# Altium PCB 0-PCB2.PcbDoc
Units mil, origin at the board's own origin, x right, y up, seen from the top; angles counter-clockwise.
Board outline 1878.39 x 1878.39 mil, 2 copper layers (Top Layer, Bottom Layer); 29 components, 33 nets, 249 pads, 40 vias.
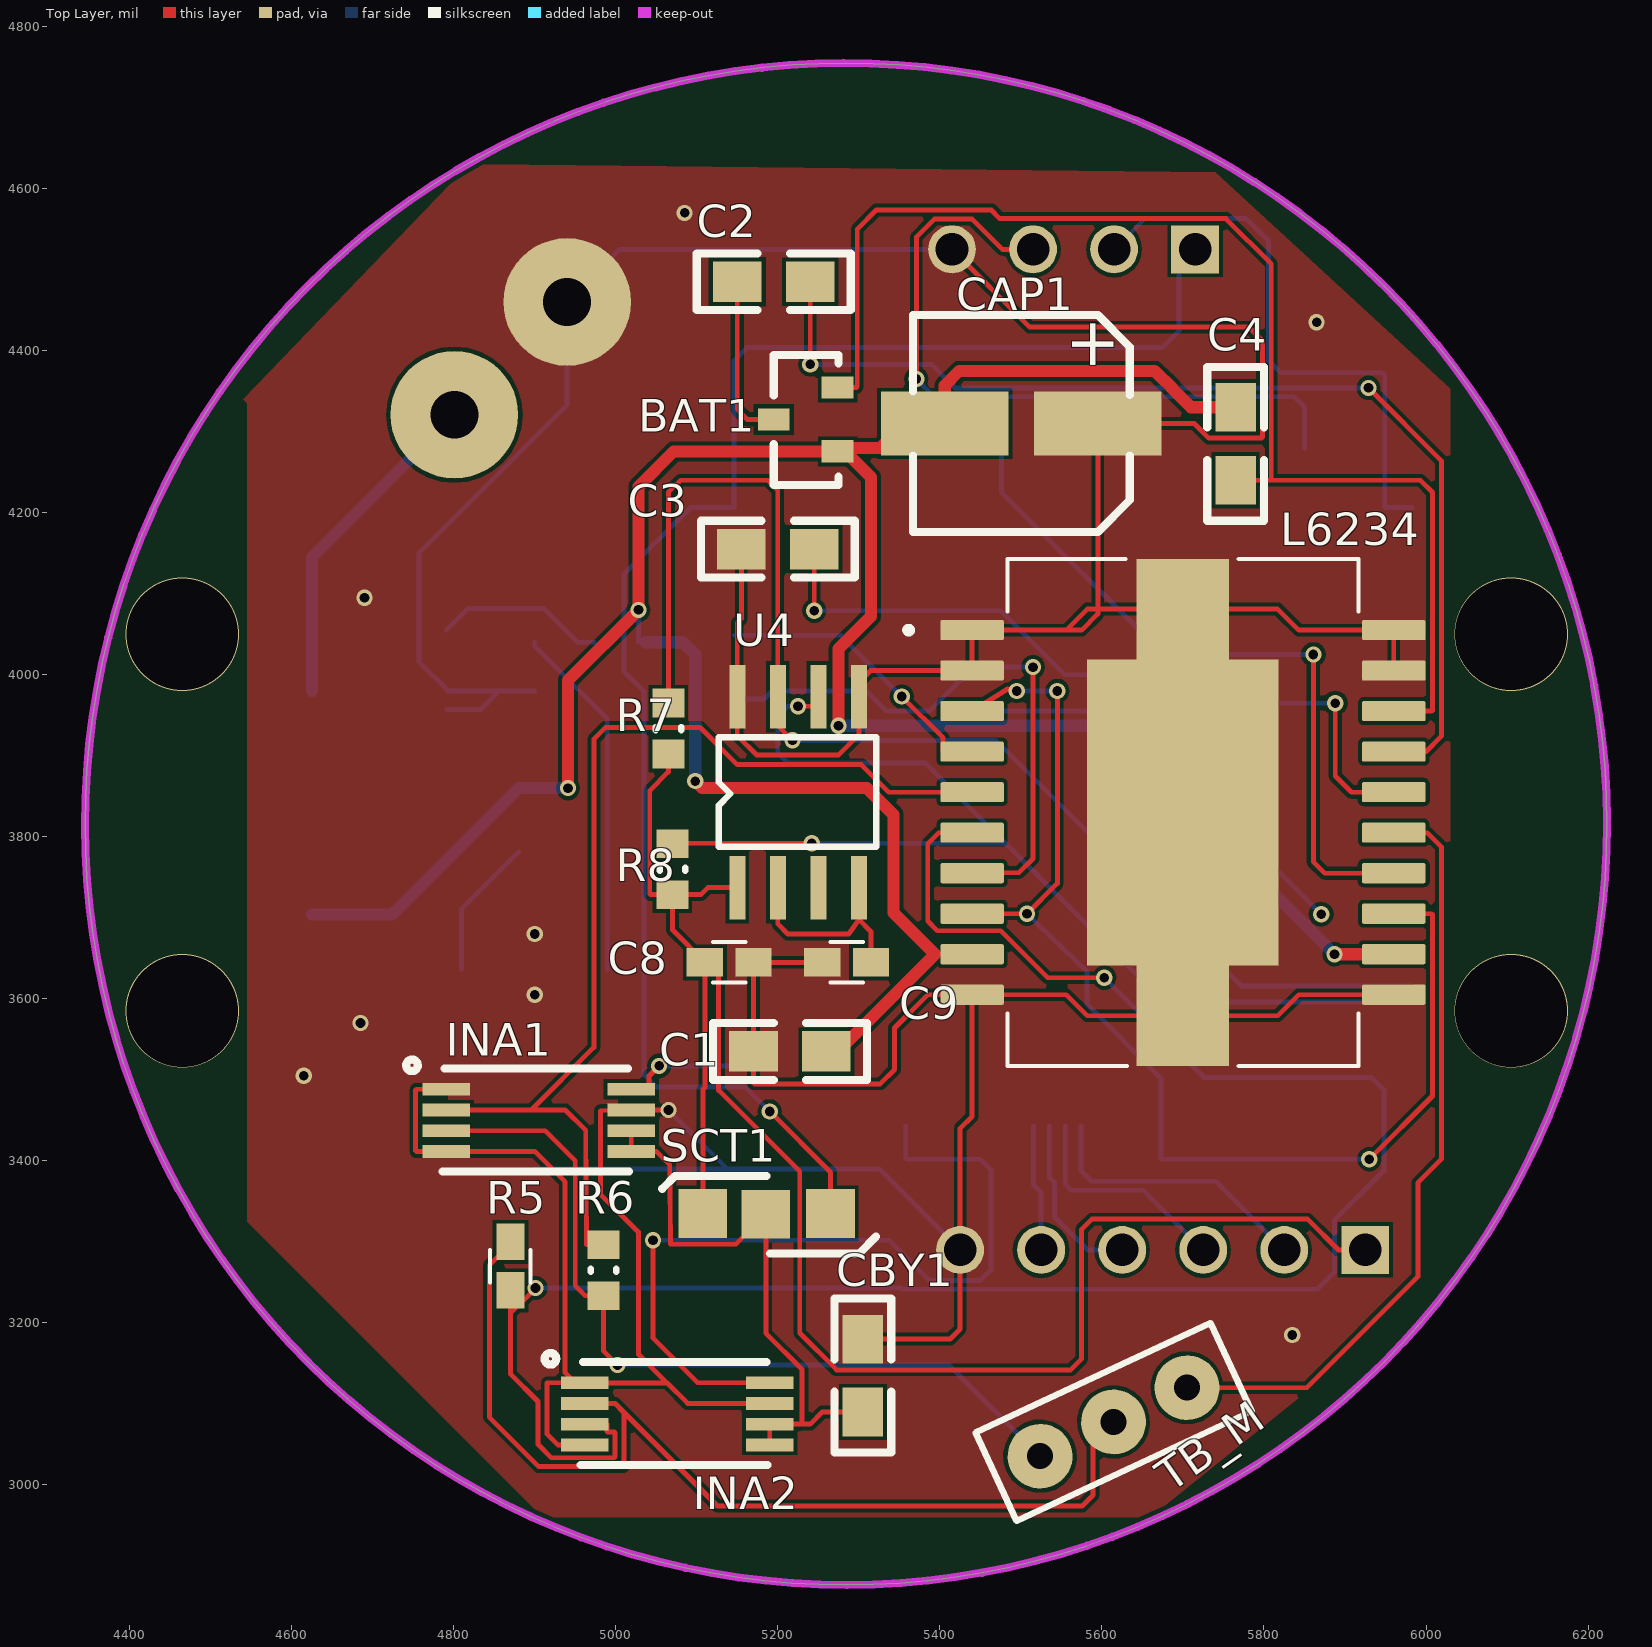
[diagram p0: Top Layer view]
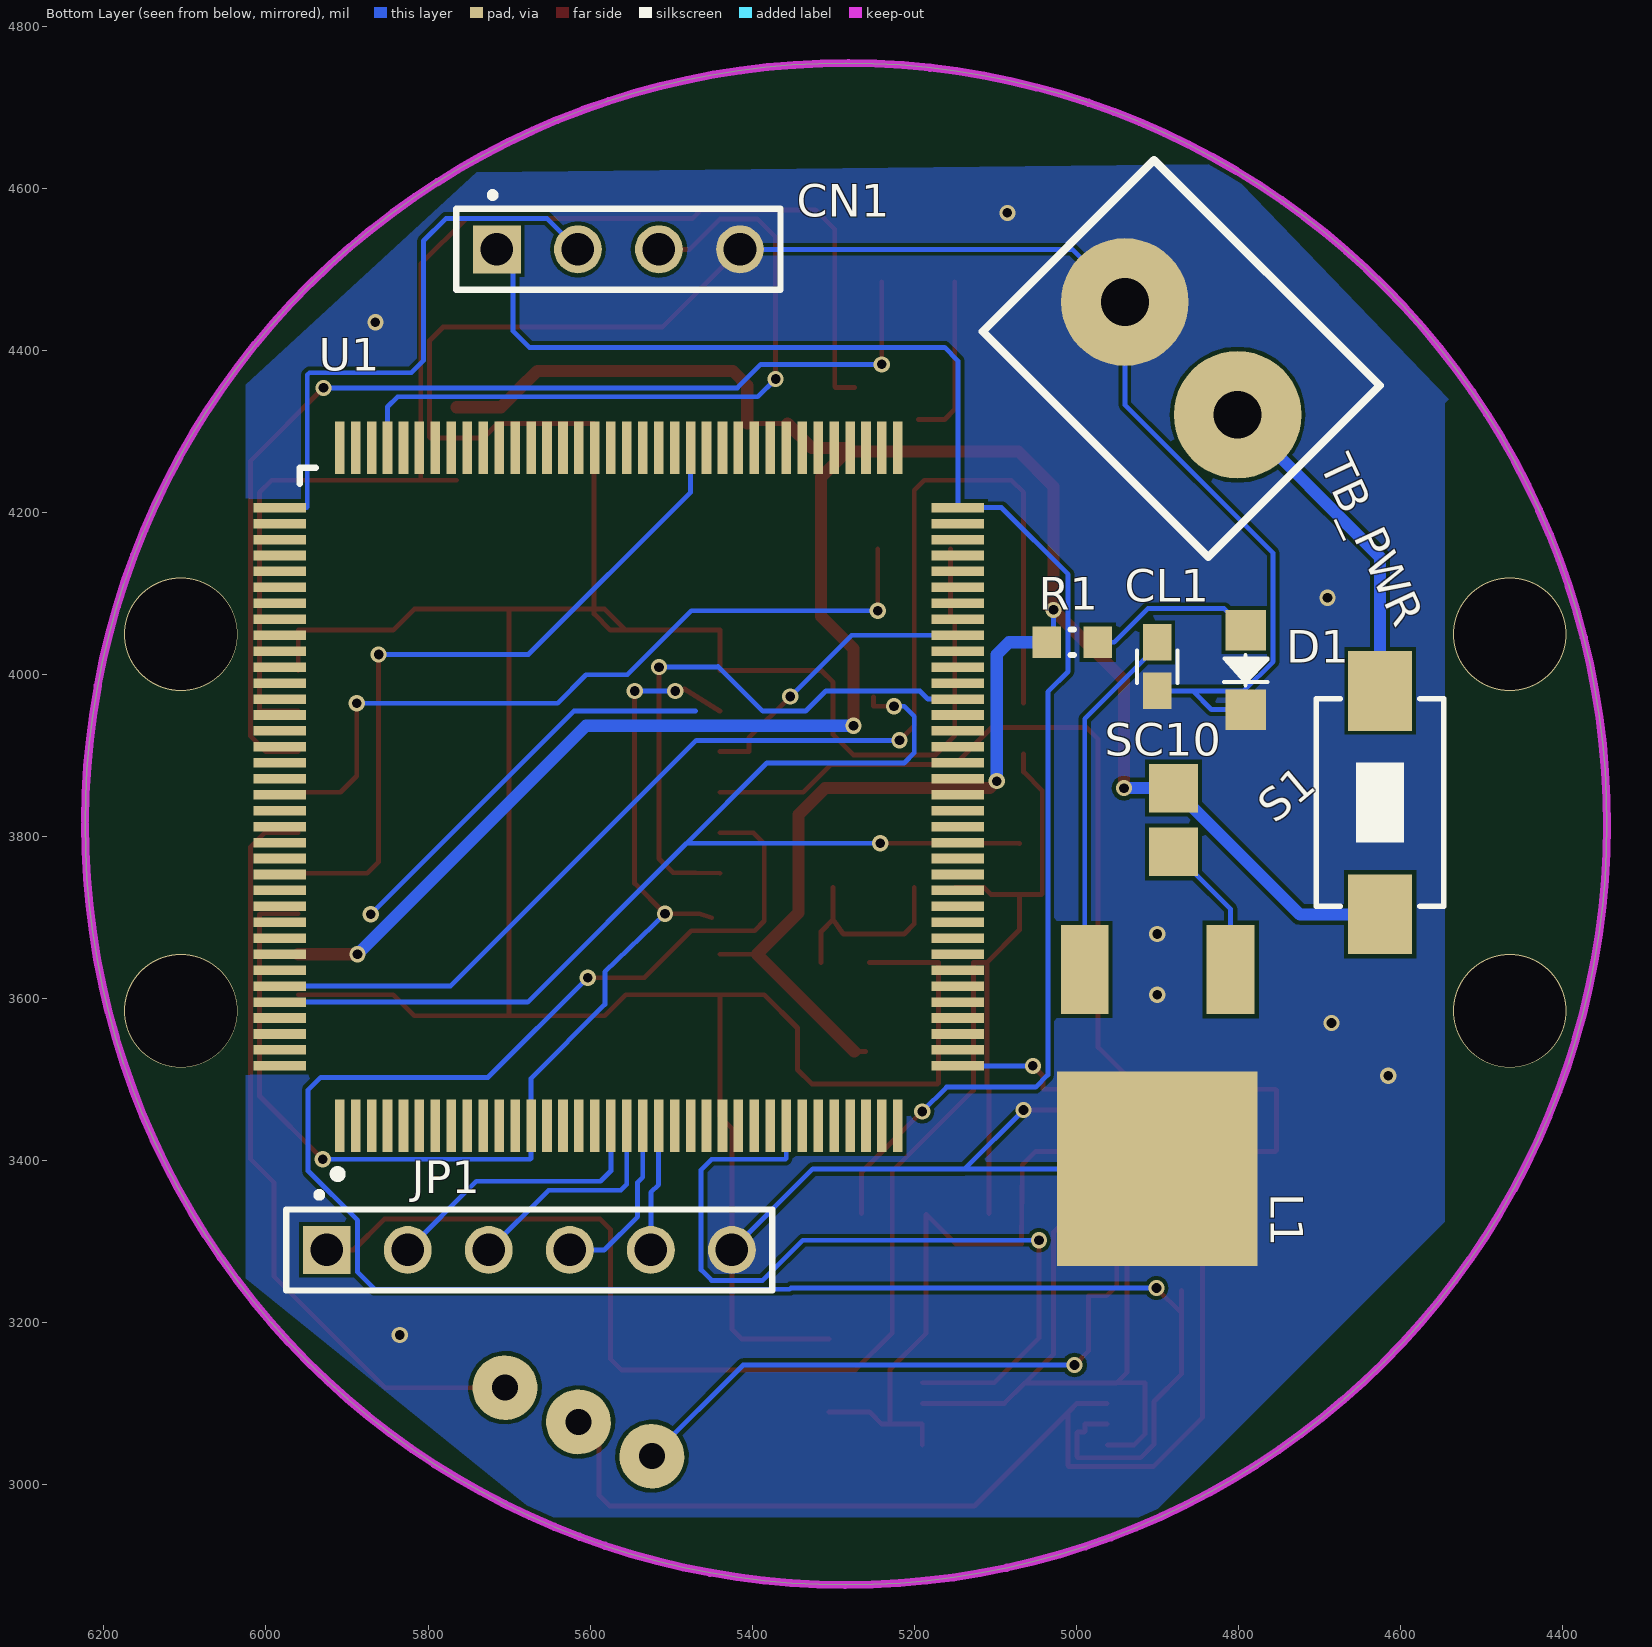
[diagram p1: Bottom Layer view, seen from below]

## Layer stack, top to bottom
Top Solder: solder mask 0.4, Solder Resist, Dk 3.5
Top Layer: signal copper 1.4
Dielectric 1: dielectric 12.6, FR-4, Dk 4.8
Bottom Layer: signal copper 1.4
Bottom Solder: solder mask 0.4, Solder Resist, Dk 3.5

## Board outline
4344.95,3815.73 ccw(c5284.15,3815.73) 5284.15,2876.54 ccw(c5284.15,3815.73) 6223.35,3815.73 ccw(c5284.15,3815.73) 5284.15,4754.93 ccw(c5284.15,3815.73)

## Design rules (kind name [scope] priority, off if disabled: settings)
Clearance [All] p1: gap=5 ignorepadtopadclearanceinfootprint=FALSE
HoleSize [All] p1: absolutevalues=TRUE maxlimit=150 minlimit=1 maxpercent=80.000 minpercent=20.000
HoleToHoleClearance [All] p1: gap=5 allowstackedmicrovias=TRUE
MinimumSolderMaskSliver [All] p1: minsoldermaskwidth=0
PlaneConnect [All] p1: planeconnectstyle=Direct reliefexpansion=20 reliefentries=4 reliefconductorwidth=10 reliefairgap=10
PolygonConnect [All] p1: connectstyle=Direct reliefconductorwidth=10 reliefentries=4 polygonreliefangle="90 Angle" airgapwidth=10
RoutingVias [All] p1: holewidth=12 width=24 viastyle="Through Hole" minholewidth=12 minwidth=24 maxholewidth=12 maxwidth=24
SilkToSilkClearance [All] p1: silktosilkclearance=5
SilkToSolderMaskClearance [IsPad] p1: minsilkscreentomaskgap=0 clearancetoexposedcopper=TRUE
SolderMaskExpansion [All] p1: expansion=3 useseparateexpansions=TRUE expansionbottom=3
Width [All] p1: maxlimit=20 minlimit=6 preferedwidth=6 minimp=50.000000 maximp=50.000000 favimp=50.000000
24 further rules are at their usual default settings.

## Components (designator, comment, footprint, x,y, rotation, side; value= is the part's Value field where it differs from the comment)
BAT1 "BAT54S" BAT54s 5195,4354.37 r0 top
C1 "100nF" C0805 5260,3535 r180 top
C2 "10nF" C0805 5150,4485 r0 top
C3 "1μF" C0805 5245,4155 r180 top
C4 "220nF" C0805 5765,4330 r270 top
C8 "100nF" R/C-0603 5110,3645 r0 top
C9 "1μF" R/C-0603 5315,3645 r180 top
CAP1 "EEH-ZA1E101XP" EEH-ZA1E101XP 5366.65,4176.14 r0 top
CBY1 "0.1μF" C0805 5305,3090 r90 top
CL1 "0.1μF" R/C-0603 4900,4040 r270 bottom
CN1 "SWD" HDR_1x4_2R54_V_M 5715,4525 r180 bottom
D1 "LED" D0805+ 4790.83,4055 r270 bottom
INA1 "INA240A1" INA240 4905,3450 r270 top
INA2 "INA240A2" INA240 5075.83,3087.8 r270 top
JP1 "SPI1" HDR_1x6_2R54_V_M 5925,3290 r180 bottom
L1 "l78M08" L7805 4900,3374.25 r270 bottom
L6234 "L6234PD013TR" SOIC127P1420X360-21N 5700,3830 r0 top
R1 "2K" 0603R 5005,4040 r180 bottom
R5 "10mOhm" R/C-0603 4870,3240 r90 top
R6 "10mOhm" 0603R 4985,3265 r270 top value=1K
R7 "4.7KOhm" 0603R 5065,3933.5 r270 top
R8 "4.7kOhm" 0603R 5070,3760 r270 top
S1 "SW SPST" SW_PB2_A1 4625,3840 r180 bottom
SC10 "solder_connection" solder_connection 4880,3860 r270 bottom
SCT1 "solder_connection_tripple" solder_connection_tripple 5186.26,3335 r180 top
TB_M "TB002-500-03BE" 10.7MHZ 5705,3120 r205 top
TB_PWR "TB002-500-02BE" TB002-500-02BE 4940,4460 r225 bottom
U1 "MCU_LQFP144" LQFP144_0R5_SKT 5564.57,3861.69 r180 bottom
U4 "AS5600" "SOIC 8" 5225,3855 r90 top

## Footprints (in the part's own frame and the unit in brackets; to place one, negate y for a bottom-side part, rotate by r counter-clockwise, add the part's x,y. Pads: shape width x height; smd on the part's side, far side on the other; paste and mask are expansions set on the pad)
10.7MHZ [mil]
  round 80 hole 32: 1(0,0) 2(200,0) 3(100,0)
  silkscreen extent -60,-60 260,60
0603R [mm] "Chip Resistor, Body 1.6x0.8mm, IPC Medium Density"
  rect 0.9x1 smd: 1(-0.8,0) 2(0.8,0)
  silkscreen extent -0.05,-0.4 0.05,0.4, body extent -0.85,-0.47 0.85,0.47, height 0.6
BAT54s [mm]
  rect 1x0.7 smd: 1(2,-2) 2(2,0) 3(0,-1)
  silkscreen extent 0,-3.05 2.03,1.02, body extent -0.46,-2.48 2.46,0.44, height 1
C0805 [mil]
  rect 60x50 smd: 1(0,0) 2(90,0)
  silkscreen extent -50,-35 140,35
D0805+ [mil]
  rect 50x50 smd: A(0,0) K(98,0)
  silkscreen extent 31,-27 68,27
EEH-ZA1E101XP [mm]
  rect 4x2 smd: 1(1,3.4) 2(5.8,3.4)
  silkscreen extent 0,0 6.8,6.8, body extent -0.3,0.2 7,6.8, height 7.7
HDR_1x4_2R54_V_M [mm] "Male Header, Pitch 2.54mm, 4x1 Position, Mated Height 6mm, Tail Length 3mm"
  rect 1.5x1.5 hole 1.02: 1(0,0)
  round 1.5 hole 1.02: 2(2.54,0) 3(5.08,0) 4(7.62,0)
  silkscreen extent -1.27,-1.27 8.89,1.76, body extent -1.27,-1.27 8.89,1.27, height 9
HDR_1x6_2R54_V_M [mm] "Male Header, Pitch 2.54mm, 6x1 Position, Mated Height 6mm, Tail Length 3mm"
  rect 1.5x1.5 hole 1.02: 1(0,0)
  round 1.5 hole 1.02: 2(2.54,0) 3(5.08,0) 4(7.62,0) 5(10.16,0) 6(12.7,0)
  silkscreen extent -1.27,-1.27 13.97,1.79, body extent -1.27,-1.27 13.97,1.27, height 9
INA240 [mm]
  rect 0.4x1.5 smd mask+0.05: 1(-0.975,-2.9) 2(-0.325,-2.9) 3(0.325,-2.9) 4(0.975,-2.9) 5(0.975,2.9) 6(0.325,2.9) 7(-0.325,2.9) 8(-0.975,2.9)
  silkscreen extent -1.91,-4.16 1.6,2.82, body extent -1.5,-3.3 1.5,3.3, height 1.2
L7805 [mm] "l7805"
  rect 2.8x1.5 smd: 1(-6.65,2.3) 3(-6.65,-2.272)
  rect 6.1x6.3 smd: 2(-0.4,0)
  body extent -7.66,-3.3 2.06,3.1, height 2.3
LQFP144_0R5_SKT [mm] "32-bit MCU ARM-based Cortex-M3 20 X 20mm, 0.5mm Pitch, 1.6mm Max thickness"
  rect 0.3x1.65 smd: 1(-8.75,-10.625) 2(-8.25,-10.625) 3(-7.75,-10.625) 4(-7.25,-10.625) 5(-6.75,-10.625) 6(-6.25,-10.625) 7(-5.75,-10.625) 8(-5.25,-10.625) 9(-4.75,-10.625) 10(-4.25,-10.625) 11(-3.75,-10.625) 12(-3.25,-10.625) 13(-2.75,-10.625) 14(-2.25,-10.625) 15(-1.75,-10.625) 16(-1.25,-10.625) 17(-0.75,-10.625) 18(-0.25,-10.625) 19(0.25,-10.625) 20(0.75,-10.625) 21(1.25,-10.625) 22(1.75,-10.625) 23(2.25,-10.625) 24(2.75,-10.625) 25(3.25,-10.625) 26(3.75,-10.625) 27(4.25,-10.625) 28(4.75,-10.625) 29(5.25,-10.625) 30(5.75,-10.625) 31(6.25,-10.625) 32(6.75,-10.625) 33(7.25,-10.625) 34(7.75,-10.625) 35(8.25,-10.625) 36(8.75,-10.625) 73(8.75,10.625) 74(8.25,10.625) 75(7.75,10.625) 76(7.25,10.625) 77(6.75,10.625) 78(6.25,10.625) 79(5.75,10.625) 80(5.25,10.625) 81(4.75,10.625) 82(4.25,10.625) 83(3.75,10.625) 84(3.25,10.625) 85(2.75,10.625) 86(2.25,10.625) 87(1.75,10.625) 88(1.25,10.625) 89(0.75,10.625) 90(0.25,10.625) 91(-0.25,10.625) 92(-0.75,10.625) 93(-1.25,10.625) 94(-1.75,10.625) 95(-2.25,10.625) 96(-2.75,10.625) 97(-3.25,10.625) 98(-3.75,10.625) 99(-4.25,10.625) 100(-4.75,10.625) 101(-5.25,10.625) 102(-5.75,10.625) 103(-6.25,10.625) 104(-6.75,10.625) 105(-7.25,10.625) 106(-7.75,10.625) 107(-8.25,10.625) 108(-8.75,10.625)
  rect 1.65x0.3 smd: 37(10.625,-8.75) 38(10.625,-8.25) 39(10.625,-7.75) 40(10.625,-7.25) 41(10.625,-6.75) 42(10.625,-6.25) 43(10.625,-5.75) 44(10.625,-5.25) 45(10.625,-4.75) 46(10.625,-4.25) 47(10.625,-3.75) 48(10.625,-3.25) 49(10.625,-2.75) 50(10.625,-2.25) 51(10.625,-1.75) 52(10.625,-1.25) 53(10.625,-0.75) 54(10.625,-0.25) 55(10.625,0.25) 56(10.625,0.75) 57(10.625,1.25) 58(10.625,1.75) 59(10.625,2.25) 60(10.625,2.75) 61(10.625,3.25) 62(10.625,3.75) 63(10.625,4.25) 64(10.625,4.75) 65(10.625,5.25) 66(10.625,5.75) 67(10.625,6.25) 68(10.625,6.75) 69(10.625,7.25) 70(10.625,7.75) 71(10.625,8.25) 72(10.625,8.75) 109(-10.625,8.75) 110(-10.625,8.25) 111(-10.625,7.75) 112(-10.625,7.25) 113(-10.625,6.75) 114(-10.625,6.25) 115(-10.625,5.75) 116(-10.625,5.25) 117(-10.625,4.75) 118(-10.625,4.25) 119(-10.625,3.75) 120(-10.625,3.25) 121(-10.625,2.75) 122(-10.625,2.25) 123(-10.625,1.75) 124(-10.625,1.25) 125(-10.625,0.75) 126(-10.625,0.25) 127(-10.625,-0.25) 128(-10.625,-0.75) 129(-10.625,-1.25) 130(-10.625,-1.75) 131(-10.625,-2.25) 132(-10.625,-2.75) 133(-10.625,-3.25) 134(-10.625,-3.75) 135(-10.625,-4.25) 136(-10.625,-4.75) 137(-10.625,-5.25) 138(-10.625,-5.75) 139(-10.625,-6.25) 140(-10.625,-6.75) 141(-10.625,-7.25) 142(-10.625,-7.75) 143(-10.625,-8.25) 144(-10.625,-8.75)
  silkscreen extent -10,-12.27 -8.69,10
R/C-0603 [mil]
  rect 45x35 smd: 1(0,0) 2(60,0)
  silkscreen extent 10,-25 50,25
SOIC127P1420X360-21N [mm]
  rrect16% 1.99x0.63 smd: 1(-6.61,5.715) 2(-6.61,4.445) 3(-6.61,3.175) 4(-6.61,1.905) 5(-6.61,0.635) 6(-6.61,-0.635) 7(-6.61,-1.905) 8(-6.61,-3.175) 9(-6.61,-4.445) 10(-6.61,-5.715) 11(6.61,-5.715) 12(6.61,-4.445) 13(6.61,-3.175) 14(6.61,-1.905) 15(6.61,-0.635) 16(6.61,0.635) 17(6.61,1.905) 18(6.61,3.175) 19(6.61,4.445) 20(6.61,5.715)
  rect 6x9.6 smd paste-6: 21(0,0)
  rect 2.9x3.15 smd paste-3: 22(0,6.375) 23(0,-6.375)
  silkscreen extent -8.7,-7.95 5.5,7.95
"SOIC 8" [mm]
  rect 2x0.5 smd: 1(-2.993,1.905) 2(-2.993,0.635) 3(-2.993,-0.635) 4(-2.993,-1.905) 5(2.993,-1.905) 6(2.993,-0.635) 7(2.993,0.635) 8(2.993,1.905)
  silkscreen extent -1.71,-2.45 1.72,2.48
solder_connection [mil]
  rect 60x60 smd: 1(0,0) 2(78.74,0)
solder_connection_tripple [mil]
  rect 60x60 smd: 1(0.98,0.98) 2(78.74,0) 3(-78.74,0)
  Top Layer region: -28.54,34.45
  silkscreen extent -135,-46 129,49
SW_PB2_A1 [mm]
  rect 2x2.5 smd: 1(0,3.556) 2(0,-3.444)
  silkscreen extent -2,-3.19 2,3.31, body extent -2.03,-3.18 2.03,3.3, height 1.2
TB002-500-02BE [mm] "TB002-500-02BE"
  round 4 hole 1.5: 1(0,0) 2(5,0)
  silkscreen extent -2.5,-3.8 7.5,3.8, body extent -2.5,-4.4 7.5,4.6, height 13.55

## Part data
BAT1: Supplier Part Number 1=512-BAT54S, Supplier 1=Mouser
C1 C2 C3 C4 CBY1: library part CAP_1
C8 C9 CL1: library part CAP, "Capacitor"
CAP1: Supplier Part Number 1=667-EEH-ZA1E101XP, Supplier 1=Mouser
CN1: library part "Header 4", "Header, 4-Pin, Single row", Publisher="Altium Limited", Revision="17-Jul-2002: Re-released for DXP Platform."
INA1 INA2: library part INA240, Supplier Part Number 1=595-INA240A2PWR, Supplier 1=Mouser
JP1: library part "HEADER 6"
L6234: "Motor Driver BiCDMOS Parallel PowerSO-20", Package="SO-20 STMicroelectronics", Digi-Key_Part_Number=497-5352-1-ND, Digi-Key_Purchase_URL=https://www.digikey.com/product-detail/en/stmicroelectronics/L6234PD013TR/497-5352-1-ND/1154483?utm_source=snapeda&utm_medium=aggregator&utm_campaign=symbol, MF=STMicroelectronics, MP=L6234PD013TR, SnapEDA_Link=https://www.snapeda.com/parts/L6234PD013TR/STMicroelectronics/view-part/75337/?ref=snap
R1: library part RES1
R5 R7 R8: library part RES2
R6: library part Res1, "Resistor", Ordered by=Subcon, Published=8-Jun-2000, Publisher="Altium Limited", Revision="July-2002: Re-released for DXP Platform."
TB_M: Supplier Part Number 1=490-TB002-500-03BE, Supplier 1=Mouser
TB_PWR: Supplier Part Number 1=490-TB002-500-02BE, Supplier 1=Mouser

## Via types
v1: diameter 20, hole 12, Top Layer to Bottom Layer, 36 vias
v2: diameter 140, hole 138, Top Layer to Bottom Layer, 4 vias

## Nets (pads, with @x,y where several pads share a name; then routed paths per layer and width w, separated by ;. In a path a pad name is that pad's centre, name@x,y a point inside that pad or via, vN(x,y) a via of type N, cw(c..) or ccw(c..) an arc to the next point about the centre after c; other vN are vias at no path point)
+3.3: CN1.1 SCT1.3 U1.72 | length 1995.8
  Top Layer w6: v1(5190,3461) 5265,3386 SCT1.3
  Bottom Layer w6: U1.72 U1.72@5146,4206.18 ; v1(5190,3461) 5160,3491 5050,3491 5035,3506 5035,3979 5010,4004 5010,4124 5092.18,4206.18 U1.72@5146,4206.18 ; CN1.1 5695,4525 5695,4424 5675,4404 5162.5,4404 5146,4387.5 U1.72@5146,4206.18
+5: C8.1 JP1.1 R7.2 R8.2 SCT1.2 U4.1 | length 2124.4
  Top Layer w6: R7.2 5065,3880 5042,3857 5042,3729.51 5043,3728.51 R8.2 ; SCT1.2 5107.52,3488 5110,3490.48 C8.1 ; U4.1 5113.66,3737.17 5105,3728.51 R8.2 ; JP1.1 5892,3290 5854,3328 5587.5,3328 5575,3315.5 5575,3155.5 5561.5,3142 5272.5,3142 5227,3187.5 5227,3387 5127,3487 5127,3645 C8.1 ; R8.2 5070,3685 C8.1
GND: C1.2 C3.2 C8.2 C9.2 CAP1.2 CBY1.2 CL1.2 CN1.4 D1.K INA1.1 INA1.4 INA1.7 INA2.1 INA2.4 INA2.7 JP1.6 L1.2 L6234.1 L6234.2 L6234.10 L6234.11 L6234.19 L6234.20 L6234.21 L6234.22 L6234.23 TB_PWR.1 U4.5 U4.8 | length 7922.5
  Top Layer w6: INA1.1 4754,3488.39 4753,3487.39 4753,3412.61 4754,3411.61 INA1.4 4900,3411.61 4937.5,3374.11 4937.5,3138.5 INA2.1@4949.82,3126.18 ; INA2.4 4928.36,3049.41 4915.27,3062.5 4915.27,3125.59 4915.86,3126.18 INA2.1@4949.82,3126.18 ; v1(5065,3462.8) INA1.7 4981,3461.8 4981,3359 5028,3312 5028,3161.18 5063,3126.18 ; C3.2 5155,4069 5150,4064 U4.8 5150,3924.73 5173.73,3901 5275,3901 5300,3926 U4.5 5300,3990.58 5314.42,4005 L6234.2 L6234.1 5556,4055 ; INA2.7 5088.59,3100.59 5063.18,3126 ; C9.2 C8.2 C1.2 5170,3496 5171,3495 5326.5,3495 5344,3512.5 5344,3564 5385,3605 L6234.10 ; CBY1.2 5412.5,3180 5425,3192.5 JP1.6 5425,3440 5439.76,3454.76 L6234.10 ; CN1.4 5511,4429 5781.5,4429 5798,4412.5 5798,4293 5797,4292 5732,4292 5714,4310 CAP1.2 5595,4080.98 ; L6234.11 5842.99,3605 5817,3579.01 L6234.23 ; L6234.19 L6234.20 5842.98,4055 5817,4080.98 L6234.22 ; INA2.1@4949.82,3126.18 4950,3126 5063.18,3126 ; INA2.1@4949.82,3126.18 INA2.1 5063,3126.18 ; 5063,3126.18 5063.18,3126 ; L6234.10 5556,3605 5581.99,3579.01 L6234.23 ; 5556,4055 5581.98,4080.98 5595,4080.98 ; 5556,4055 5575,4055 5595,4075 5595,4080.98 ; 5595,4080.98 L6234.22 ; L6234.23 L6234.21 L6234.22
  Bottom Layer w6: D1.K 4833,3957 4856,3980 ; L1.2 5137.8,3390 ; CL1.2 4856,3980 ; v1(5065,3462.8) 5137.8,3390 ; CN1.4 5005,4525 TB_PWR.1 4940,4333 4757,4150 4757,4016 4793,3980 4856,3980 ; JP1.6 5325,3390 5137.8,3390
  other v1: 5835,3185 4615,3505 4685,3570 4900,3605 4900,3680 4690,4095 5865,4435 5085,4570
NetBAT1_2: BAT1.2 C4.2 L6234.18 | length 1601.4
  Top Layer w6: BAT1.2 5297,4354.37 5298,4355.37 5298,4550 5321.53,4573.53 5463.53,4573.53 5474.06,4563 5753,4563 5809,4507 5809,4241 5808,4240 ; C4.2 5808,4240 ; L6234.18 6007,3955 6008,3956 6008,4225 5993,4240 5808,4240
NetBAT1_3: BAT1.3 C2.1 | length 207.7
  Top Layer w6: C2.1 5150,4327.5 5162.5,4315 BAT1.3
NetC2_2: C2.2 L6234.17 | length 1336.9
  Top Layer w6: v1(5240,4383) C2.2 ; v1(5929,4354) 6019,4264 6019,3924 6000,3905 L6234.17
  Bottom Layer w6: v1(5240,4383) 5389.15,4383 5418.15,4354 v1(5929,4354)
NetC3_1: C3.1 L6234.16 | length 936.6
  Top Layer w6: v1(5245,4079) C3.1 ; v1(5888,3964.84) 5888,3875 5908,3855 L6234.16
  Bottom Layer w6: v1(5245,4079) 5475,4079 5554,4000 5605,4000 5640.16,3964.84 v1(5888,3964.84)
NetC9_1: C9.1 U4.2 U4.4 | length 257.6
  Top Layer w6: U4.2 5200,3692.5 5212.5,3680 5287.5,3680 U4.4@5300,3698 ; U4.4 U4.4@5300,3698 ; C9.1 5315,3683 U4.4@5300,3698
NetCBY1_1: CBY1.1 INA1.5 INA1.6 INA2.5 INA2.6 SCT1.1 | length 735.6
  Top Layer w6: INA1.6 INA1.5 5050,3411.61 5066.69,3394.93 5067.69,3297 5148.26,3297 SCT1.1 5185.28,3187.22 5230,3142.5 5230,3076 5229,3075 ; INA2.5 INA2.6 5229,3075 ; CBY1.1 5255,3090 5240,3075 5229,3075
NetCL1_1: CL1.1 L1.3 | length 441
  Bottom Layer w6: CL1.1 4900,4035 4989.45,3945.55 L1.3
NetCN1_2: CN1.2 U1.109 | length 713.3
  Bottom Layer w6: CN1.2 5653,4563 5778,4563 5805.76,4535.24 5805.76,4387.5 5820.51,4372.74 5946.23,4372.74 5949,4369.97 5949,4207.18 5950,4206.18 U1.109
NetCN1_3: CN1.3 U1.105 | length 887.7
  Top Layer w6: v1(5371,4365) 5371,4540 5393.53,4562.53 5439.47,4562.53 5477,4525 CN1.3
  Bottom Layer w6: v1(5371,4365) 5393,4343 5837.5,4343 5850,4330.5 U1.105
NetD1_A: D1.A R1.2 | length 210.8
  Bottom Layer w6: D1.A 4817.33,4081.5 4911.5,4081.5 4953,4040 R1.2
NetINA1_2: INA1.2 L6234.5 R6.1 | length 1340.2
  Top Layer w6: INA1.2 4895.8,3462.8 ; R6.1 4964,3296.5 4963,3437.5 4937.7,3462.8 4895.8,3462.8 ; L6234.5 5337,3855 5303,3889 5150,3889 5104,3935 4987.5,3935 4973,3920.5 4973,3540 4895.8,3462.8
NetINA1_3: INA1.3 R6.2 TB_M.2 | length 1029.7
  Top Layer w6: INA1.3 4912.85,3437.2 4950,3400.06 4950,3246.01 4962.5,3233.51 R6.2 4985,3165 v1(5002,3148)
  Bottom Layer w6: v1(5002,3148) 5411.21,3148 TB_M.2
NetINA1_8: INA1.8 U1.37 | length 148.6
  Top Layer w6: INA1.8 5041,3488.39 5041,3504.71 v1(5053.5,3517.21)
  Bottom Layer w6: v1(5053.5,3517.21) U1.37
NetINA2_2: INA2.2 R5.2 TB_M.3 | length 1285.9
  Top Layer w6: R5.2 4870,3297 4844,3271 4844,3083.5 4904.97,3022.53 5009,3022.53 5010.18,3023.72 5010.18,3089.41 ; INA2.2 4999,3100.59 5010.18,3089.41 ; TB_M.3 5589,3077.73 5589,2987.5 5575.5,2974 5125.59,2974 5010.18,3089.41
NetINA2_3: INA2.3 L6234.6 R5.1 | length 2477.8
  Top Layer w6: R5.1 4870,3212 ; v1(4901,3243) 4870,3212 ; INA2.3 4989,3075 4989,3066.29 4990,3065.29 4998,3065.29 4999.18,3064.1 4999.18,3034.72 4998,3033.53 4920.47,3033.53 4904,3050 4904,3103 4870,3137 4870,3212 ; L6234.6 5398.5,3805 5385,3791.5 5385,3696 5397,3684 5475,3684 5533,3626 v1(5603,3626)
  Bottom Layer w6: v1(4901,3243) 5352.23,3243 5353.75,3241.47 5865.97,3241.47 5887,3262.5 5887,3326.5 5948,3387.5 5948,3487.5 5932.5,3503 5726,3503 v1(5603,3626)
NetINA2_8: INA2.8 U1.29 | length 1005.3
  Top Layer w6: v1(5046,3302) 5046,3181.18 5101,3126.18 INA2.8
  Bottom Layer w6: v1(5046,3302) 5337.47,3302 5387,3252.47 5450,3252.47 5463,3265.47 5463,3389 5450,3402 5358.87,3402 5357.87,3403 U1.29
NetJP1_2: JP1.2 U1.18 | length 346.9
  Bottom Layer w6: U1.18 5574.41,3387.5 5587.18,3374.73 5740.27,3374.73 JP1.2
NetJP1_3: JP1.3 U1.19 | length 276.2
  Bottom Layer w6: U1.19 5554.72,3371 5562,3363.73 5651.27,3363.73 JP1.3
NetJP1_4: JP1.4 U1.20 | length 215.5
  Bottom Layer w6: U1.20 5535.04,3379.96 5541.4,3373.6 5541.4,3331.19 5582.59,3290 JP1.4
NetJP1_5: JP1.5 U1.21 | length 157.4
  Bottom Layer w6: U1.21 5515.35,3370.65 5525,3361 JP1.5
NetL1_1: L1.1 SC10.2 | length 174.4
  Bottom Layer w6: L1.1 4809.45,3710.71 SC10.2
NetL6234_3: L6234.3 L6234.8 L6234.13 U1.13 | length 1473.8
  Top Layer w6: L6234.3 5483.99,3982.56 v1(5495,3980) ; L6234.8@5449.76,3700 5465,3705 v1(5507.5,3705) 5545,3742.5 v1(5545,3980) ; v1(5930,3402) 6008,3480 6008,3704 6007,3705 L6234.13
  Bottom Layer w6: v1(5495,3980) v1(5545,3980) ; v1(5507.5,3705) 5581.74,3633.26 5581.74,3593.08 5672.83,3501.99 U1.13 5672.83,3403 5673.83,3402 v1(5930,3402)
NetL6234_4: L6234.4 U1.64 | length 363
  Top Layer w6: v1(5353,3973) 5404,3922 5404,3905 L6234.4
  Bottom Layer w6: U1.64 5277.3,4048.7 v1(5353,3973)
NetL6234_7: L6234.7 U1.60 | length 724.9
  Top Layer w6: L6234.7 5498,3756 5515,3773 v1(5515,4009.33)
  Bottom Layer w6: U1.60 5183.01,3969.96 5192.97,3979.92 5309.21,3979.92 5334.13,3955 5386.93,3955 5441.93,4010 5442.6,4009.33 v1(5515,4009.33)
NetL6234_14: L6234.14 U1.86 | length 883.9
  Top Layer w6: v1(5861,4025) 5861,3769 5875,3755 L6234.14
  Bottom Layer w6: U1.86 5475.98,4225 5675.98,4025 v1(5861,4025)
NetL6234_15: L6234.15 TB_M.1 | length 950.3
  Top Layer w6: TB_M.1 5853,3120 5990,3257 5990,3373 6019,3402 6019,3787.5 6001.5,3805 L6234.15
NetR7_1: R7.1 U1.139 U4.7 | length 1612.9
  Top Layer w6: R7.1 5065,4225 5080,4240 5187.5,4240 5200,4227.5 U4.7 5200,3937 v1(5218,3919)
  Bottom Layer w6: v1(5218,3919) 5469,3919 5772.37,3615.63 U1.139
NetR8_1: R8.1 U1.140 U4.6 | length 1711
  Top Layer w6: R8.1 5070,3792 v1(5242,3792) ; v1(5225,3961) 5250,3961 U4.6
  Bottom Layer w6: v1(5225,3961) 5212.5,3961 5200,3948.5 5200,3903.5 5212.5,3891 5381.95,3891 5480.95,3792 ; v1(5242,3792) 5480.95,3792 ; U1.140 5677.05,3595.95 ; 5480.95,3792 5481,3792 5677.05,3595.95 ; 5480.95,3792 5677,3595.95 5677.05,3595.95
NetS1_1: S1.1 TB_PWR.2 | length 413.6
  Bottom Layer w15: S1.1 4625,4145 TB_PWR.2
VCC1: BAT1.1 C1.1 C4.1 CAP1.1 L6234.9 L6234.12 R1.1 S1.2 SC10.1 | length 3762.5
  Top Layer w6: C1.1 C1.1@5274,3535 ; BAT1.1 5283,4275.63 BAT1.1@5283,4280 ; CAP1.1@5356.37,4310 CAP1.1 ; 5394,3655 L6234.9
  Top Layer w15: v1(4941,3860) 4941,3993 v1(5028,4080) 5028,4232 5071.63,4275.63 BAT1.1 ; v1(5098,3868.66) 5106.66,3860 5310.08,3860 5342.77,3827.31 5342.77,3706.23 5394,3655 C1.1@5274,3535 ; v1(5275,3937) 5275,4032 5315,4072 5315,4243.63 BAT1.1@5283,4275.63 ; BAT1.1@5283,4280 5326.37,4280 CAP1.1@5356.37,4310 ; CAP1.1 5406,4357 5424,4375 5665,4375 5678.13,4361.87 5678.92,4361.87 5686.24,4354.55 5686.24,4353.76 5710,4330 C4.1 ; v1(5887,3655) L6234.12
  Bottom Layer w6: S1.2@4625,3704 S1.2 ; v1(5028,4080) 5028,4040 R1.1
  Bottom Layer w15: S1.2@4625,3704 4724,3704 SC10.1 v1(4941,3860) ; R1.1 5083,4040 5098,4025 v1(5098,3868.66) ; v1(5275,3937) 5605,3937 v1(5887,3655)
pads on no net: U1.1 U1.2 U1.3 U1.4 U1.5 U1.6 U1.7 U1.8 U1.9 U1.10 U1.11 U1.12 U1.14 U1.15 U1.16 U1.17 U1.22 U1.23 U1.24 U1.25 U1.26 U1.27 U1.28 U1.30 U1.31 U1.32 U1.33 U1.34 U1.35 U1.36 U1.38 U1.39 U1.40 U1.41 U1.42 U1.43 U1.44 U1.45 U1.46 U1.47 U1.48 U1.49 U1.50 U1.51 U1.52 U1.53 U1.54 U1.55 U1.56 U1.57 U1.58 U1.59 U1.61 U1.62 U1.63 U1.65 U1.66 U1.67 U1.68 U1.69 U1.70 U1.71 U1.73 U1.74 U1.75 U1.76 U1.77 U1.78 U1.79 U1.80 U1.81 U1.82 U1.83 U1.84 U1.85 U1.87 U1.88 U1.89 U1.90 U1.91 U1.92 U1.93 U1.94 U1.95 U1.96 U1.97 U1.98 U1.99 U1.100 U1.101 U1.102 U1.103 U1.104 U1.106 U1.107 U1.108 U1.110 U1.111 U1.112 U1.113 U1.114 U1.115 U1.116 U1.117 U1.118 U1.119 U1.120 U1.121 U1.122 U1.123 U1.124 U1.125 U1.126 U1.127 U1.128 U1.129 U1.130 U1.131 U1.132 U1.133 U1.134 U1.135 U1.136 U1.137 U1.138 U1.141 U1.142 U1.143 U1.144 U4.3
copper on no net: | length 504.4
  Bottom Layer w6: 5470,3955 5620,3955 v1(5870.59,3704.41)
  other v2: 4465,3585 6105,3585 4465,4050 6105,4050

## Polygon pours and split planes (outlines as drawn)
GND on Bottom Layer "Bottom Layer-GND" (solid, remove dead copper, pour order 6): 4540,4340 4545,4335 4545,3325 4910,2960 5660,2960 6025,3254.86 6025,4357.77 5740,4620 4820,4630 4810,4620
GND on Top Layer "Top Layer-GND" (solid, remove dead copper, pour order 4): 4540,4340 4545,4335 4545,3325 4910,2960 5660,2960 6030,3258.9 6030,4353.17 5740,4620 4820,4630 4810,4620

## Keep-outs
Keep-Out Layer:
  lines w10: 6223.3,3815.73 cw(c5284.15,3815.73) 6223.29,3820.02 ccw(c5284.15,3815.73) 6223.3,3815.73

## Text inside footprints (layer, text, board x,y; h text height)
CAP1: Top Overlay "+" at 5614.68,4372.99 h60 r90